# Altium PCB Bottom_layer_Lfr.PcbDoc
Units mm, origin at the board's own origin, x right, y up, seen from the top; angles counter-clockwise.
Board outline 116 x 91.03 mm, 2 copper layers (Top Layer, Bottom Layer); 22 components, 20 nets, 120 pads, 2 vias.
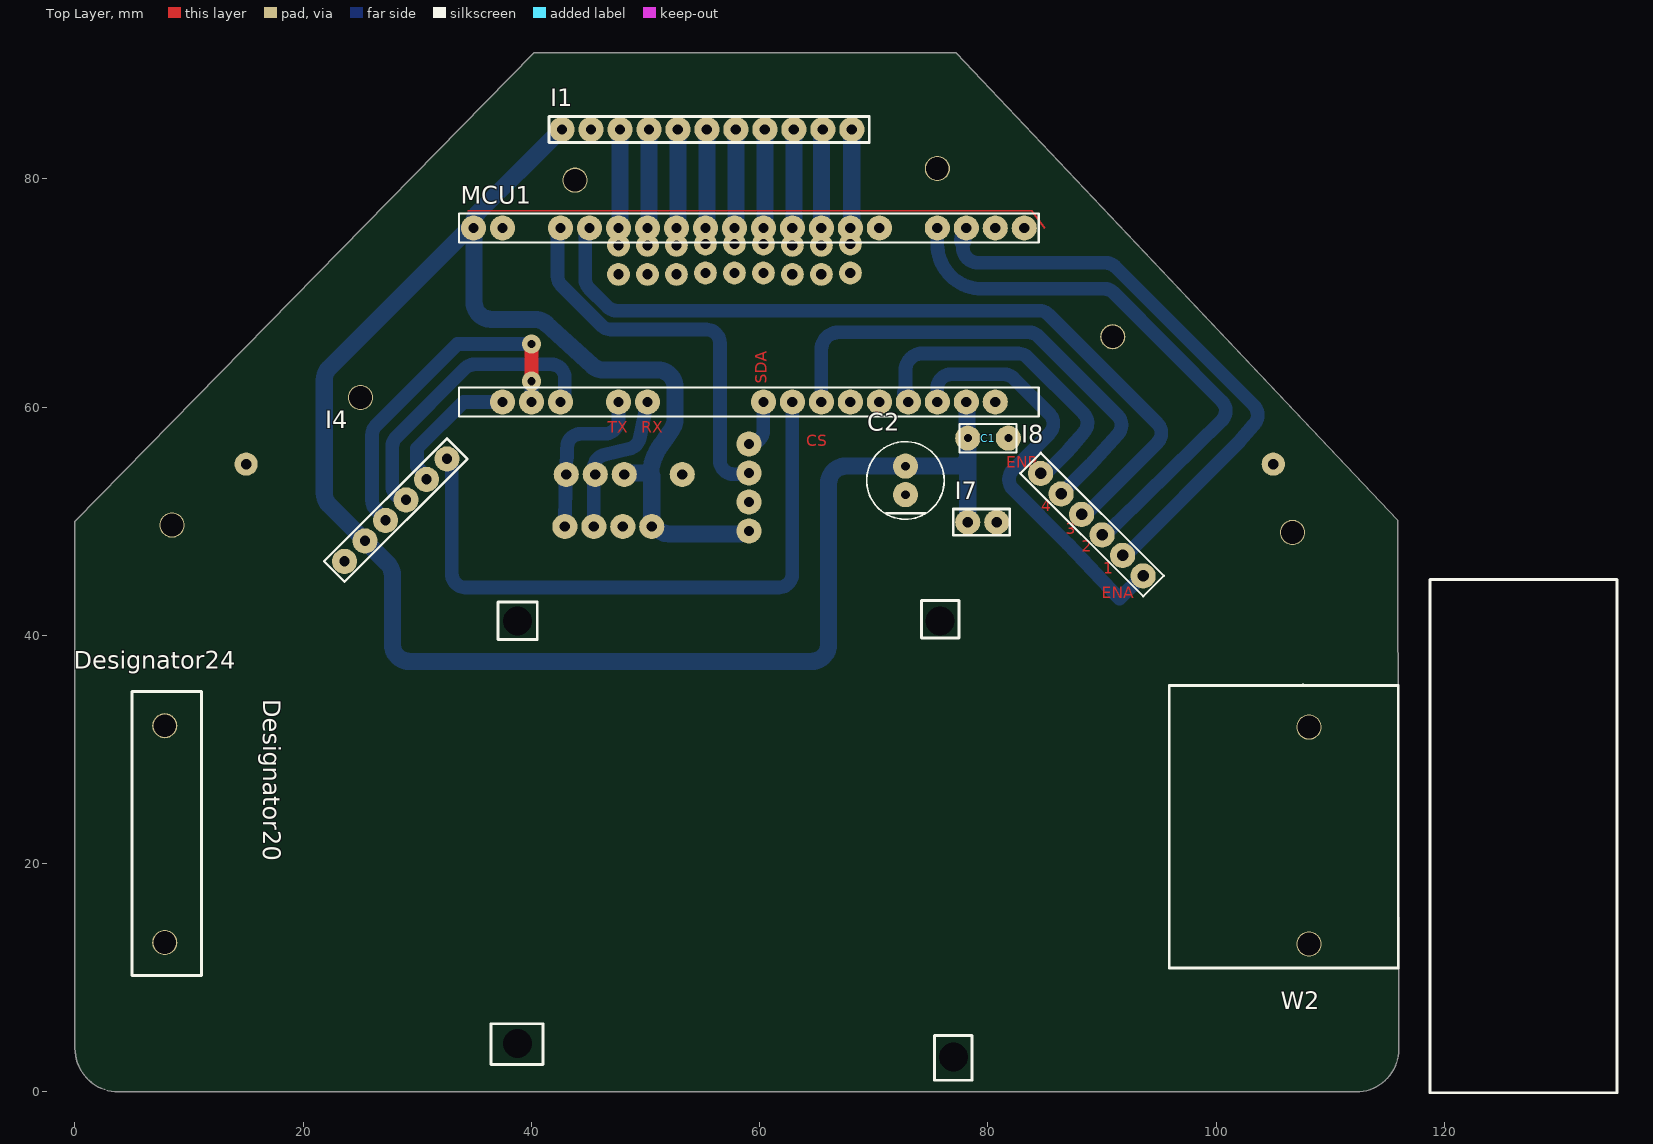
[diagram p0: Top Layer view]
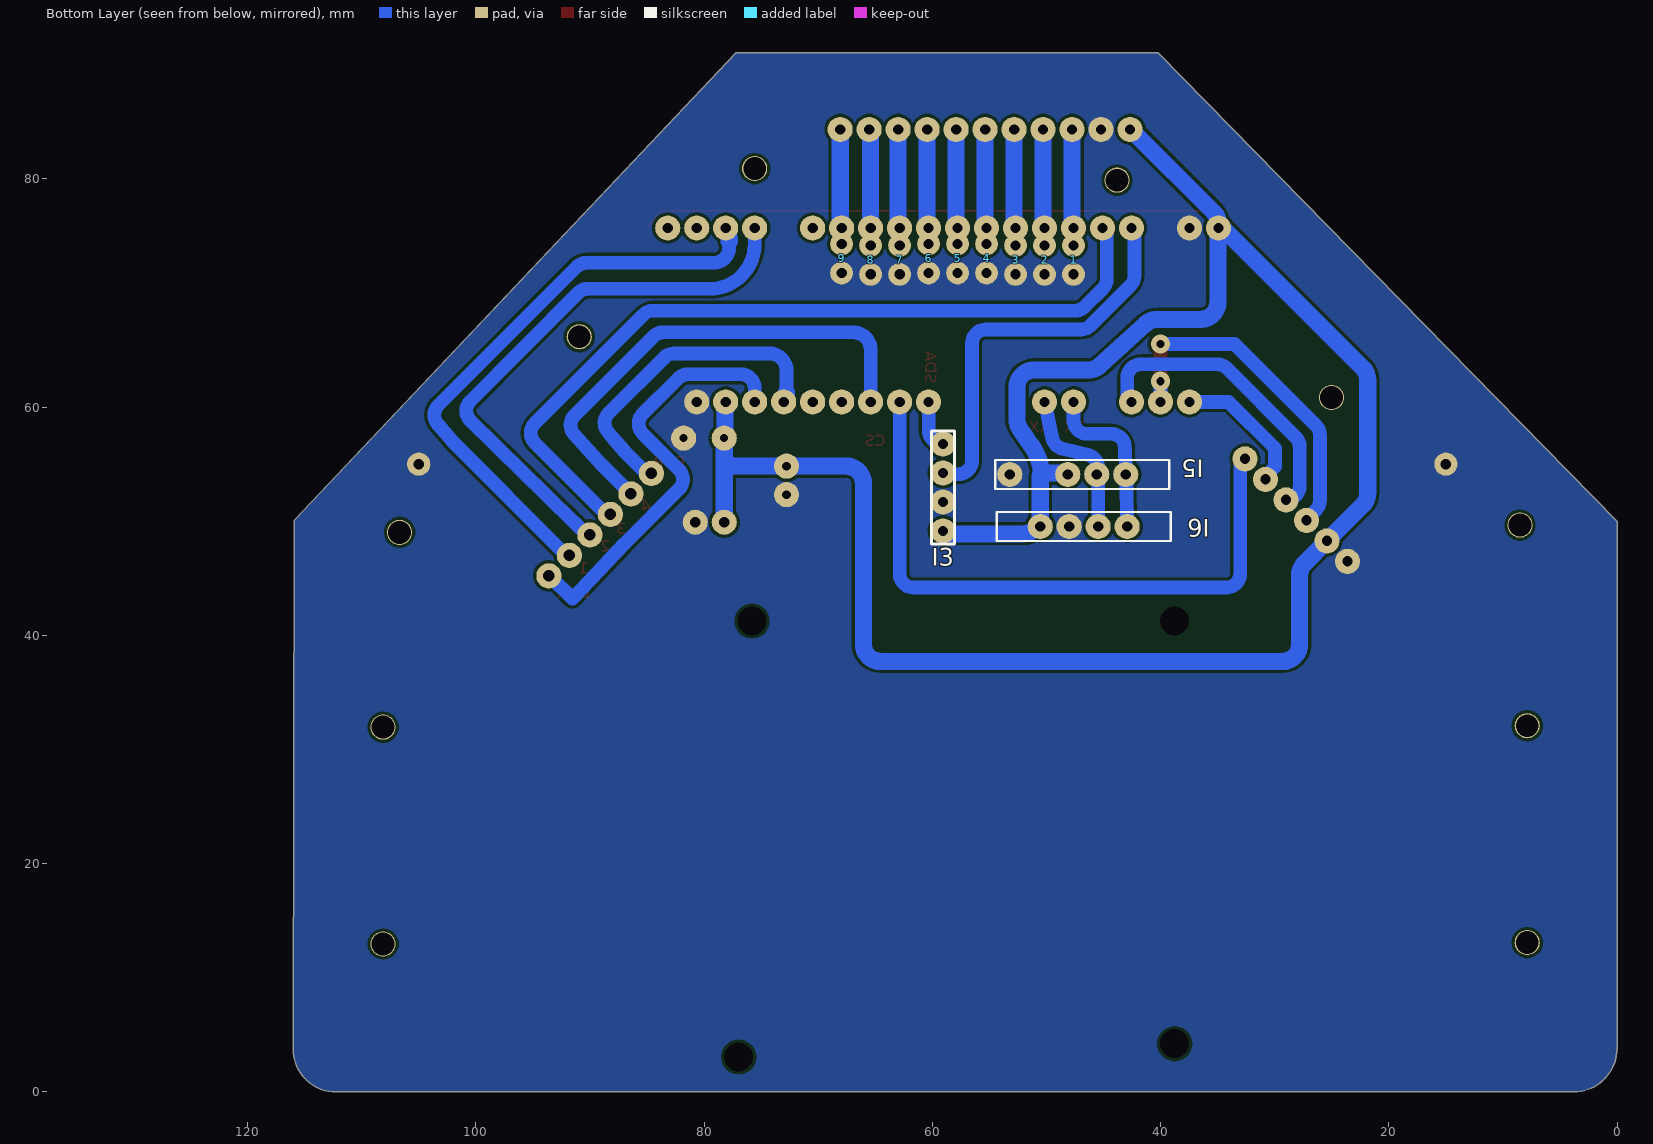
[diagram p1: Bottom Layer view, seen from below]

## Layer stack, top to bottom
Top Solder: solder mask 0.0102, Solder Resist, Dk 3.5
Top Layer: signal copper 0.0356
Dielectric 1: dielectric 0.32, FR-4, Dk 4.8
Bottom Layer: signal copper 0.0356
Bottom Solder: solder mask 0.0102, Solder Resist, Dk 3.5

## Board outline
0,3.81 0,50 40.195,91.032 77.216,91.032 115.896,50.104 116,3.732 cw(c112.269,3.731) 112.268,0 3.81,0 cw(c3.81,3.81)

## Design rules (kind name [scope] priority, off if disabled: settings)
Clearance [All] p1: gap=0.254 ignorepadtopadclearanceinfootprint=FALSE
PolygonConnect PolygonConnect_4 [All vs IsNamedPolygon('GND_L02_P000')] p1: thpad.connectstyle=Direct thpad.reliefconductorwidth=0.254 thpad.reliefentries=4 thpad.polygonreliefangle="90 Angle" thpad.airgapwidth=0.254 smdpad.connectstyle=Relief smdpad.reliefconductorwidth=0.254 smdpad.reliefentries=4 smdpad.polygonreliefangle="90 Angle" smdpad.airgapwidth=0.254 via.connectstyle=Relief via.reliefconductorwidth=0.254 via.reliefentries=4 via.polygonreliefangle="90 Angle" via.airgapwidth=0.254
PolygonConnect PolygonConnect_3 [All vs IsNamedPolygon('NONET_L01_P000')] p2: connectstyle=Relief reliefconductorwidth=0.254 reliefentries=4 polygonreliefangle="90 Angle" airgapwidth=0.254
PolygonConnect PolygonConnect_2 [All vs IsNamedPolygon('NONET_L01_P000')] p3: thpad.connectstyle=Direct thpad.reliefconductorwidth=0.254 thpad.reliefentries=4 thpad.polygonreliefangle="90 Angle" thpad.airgapwidth=0.254 smdpad.connectstyle=Relief smdpad.reliefconductorwidth=0.254 smdpad.reliefentries=4 smdpad.polygonreliefangle="90 Angle" smdpad.airgapwidth=0.254 via.connectstyle=Relief via.reliefconductorwidth=0.254 via.reliefentries=4 via.polygonreliefangle="90 Angle" via.airgapwidth=0.254
PolygonConnect PolygonConnect_1 [All vs IsNamedPolygon('NONET_L01_P000')] p4: thpad.connectstyle=Direct thpad.reliefconductorwidth=0.254 thpad.reliefentries=4 thpad.polygonreliefangle="90 Angle" thpad.airgapwidth=0.254 smdpad.connectstyle=Relief smdpad.reliefconductorwidth=0.254 smdpad.reliefentries=4 smdpad.polygonreliefangle="90 Angle" smdpad.airgapwidth=0.254 via.connectstyle=Relief via.reliefconductorwidth=0.254 via.reliefentries=4 via.polygonreliefangle="90 Angle" via.airgapwidth=0.254
PolygonConnect [All] p5: connectstyle=Relief reliefconductorwidth=0.254 reliefentries=4 polygonreliefangle="90 Angle" airgapwidth=0.254
RoutingVias [All] p1: holewidth=0.711 width=1.27 viastyle="Through Hole" minholewidth=0.711 minwidth=1.27 maxholewidth=0.711 maxwidth=1.27
SolderMaskExpansion [All] p1: expansion=0.102 istentingtop=FALSE
SupplyNets "Schematic Supply Nets_1" [InNet('GND')] p1: voltage=0.000
SupplyNets "Schematic Supply Nets" [InNet('+5')] p2: voltage=0.000
Width [All] p1: maxlimit=5 minlimit=0.1 preferedwidth=1.2 minimp=50.000000 maximp=50.000000 favimp=50.000000
30 further rules are at their usual default settings.

## Classes and differential pairs
component class MCU: I3 I7 MCU1
component class IR_array: C1 C2 I1

## Components (designator, comment, footprint, x,y, rotation, side; value= is the part's Value field where it differs from the comment)
1 "Comment" PCBComponent_1#1 47.625,74.168 r270 bottom
2 "Comment" PCBComponent_1#1 50.165,74.168 r270 bottom
3 "Comment" PCBComponent_1#1 52.705,74.168 r270 bottom
4 "Comment" PCBComponent_1#1 55.245,74.295 r270 bottom
5 "Comment" PCBComponent_1#1 57.785,74.295 r270 bottom
6 "Comment" PCBComponent_1#1 60.325,74.295 r270 bottom
7 "Comment" PCBComponent_1#1 62.865,74.168 r270 bottom
8 "Comment" PCBComponent_1#1 65.405,74.168 r270 bottom
9 "Comment" PCBComponent_1#1 67.945,74.295 r270 bottom
C1 "0.1uF" FP-RDE0P1-MFG 80.01,57.277 r0 top
C2 "ECEA1CKA101I" FP-RAD-TH-D_6_3_0_5-L_7_1-MFG 72.771,53.574 r90 top
Designator20 "Comment" PCBComponent_1#2 57.277,22.733 r0 top
Designator24 "Comment" PCBComponent_1#3 3.861,34.061 r270 top locked
I1 "MHP1x11" MHP_1x11_ 42.672,84.328 r0 top locked
I3 "I2S" HPC_1x4 59.055,49.149 r90 bottom
I4 "M_Driver" HPC_1x6#1 23.622,46.482 r45 top locked
I5 "HC_05" HPC_1x6#2 53.213,54.102 r180 bottom
I6 "HC_05" HPC_1x6#3 53.086,49.53 r180 bottom (schematic designator I5)
I7 "" PCBComponent_1#4 80.772,49.911 r180 top
I8 "FTDI" HPC_1x6#4 93.599,45.212 r135 top locked (schematic designator I6)
MCU1 "STM32F411CE" STM32F411CE 83.185,75.692 r90 top locked
W2 "Comment" N20 112.139,10.846 r90 top locked

## Footprints (in the part's own frame and the unit in brackets; to place one, negate y for a bottom-side part, rotate by r counter-clockwise, add the part's x,y. Pads: shape width x height; smd on the part's side, far side on the other; paste and mask are expansions set on the pad)
FP-RAD-TH-D_6_3_0_5-L_7_1-MFG [mm]
  round 2.2 hole 0.762 paste-2539.97 mask+0: 1(-1.25,0) 2(1.25,0)
  silkscreen extent -3.4,-3.4 3.4,3.4, body extent -3.15,-3.16 3.15,3.15, height 8
FP-RDE0P1-MFG [mm]
  round 2.2 hole 0.7 paste-2539.97 mask+0: 1(-1.778,0) 2(1.778,0)
  silkscreen extent -2.5,-1.25 2.5,1.25, body extent -2.5,-1.25 2.5,1.25, height 6
HPC_1x4 [mm]
  round 2.2 hole 0.9: 1(0,0) 2(2.54,0) 3(5.08,0) 4(7.62,0)
  silkscreen extent -1.14,-1.02 8.76,1.02
HPC_1x6#1 [mm]
  round 2.2 hole 0.9: 1(0,0) 2(2.54,0) 3(5.08,0) 4(7.62,0) 5(10.16,0) 6(12.7,0)
  silkscreen extent -1.27,-1.27 13.97,1.27
HPC_1x6#2 [mm]
  round 2.2 hole 0.9: 1(0,0) 3(5.08,0) 4(7.62,0) 5(10.16,0)
  round 2.2 on Mech1: 2(2.54,0) 6(12.7,0)
  silkscreen extent -1.27,-1.27 13.97,1.27
HPC_1x6#3 [mm]
  round 2.2 on Mech1: 1(0,0) 6(12.7,0)
  round 2.2 hole 0.9: 2(2.54,0) 3(5.08,0) 4(7.62,0) 5(10.16,0)
  silkscreen extent -1.27,-1.27 13.97,1.27
HPC_1x6#4 [mm]
  round 2.2 hole 1: 1(0,0) 2(2.54,0) 3(5.08,0) 4(7.62,0) 5(10.16,0) 6(12.7,0)
  silkscreen extent -1.27,-1.27 13.97,1.27
MHP_1x11_ [mm]
  round 2.2 hole 0.9 mask+0.102: 1(0,0) 2(2.54,0) 3(5.08,0) 4(7.62,0) 5(10.16,0) 6(12.7,0) 7(15.24,0) 8(17.78,0) 9(20.32,0) 10(22.86,0) 11(25.4,0)
  silkscreen extent -1.14,-1.14 26.92,1.14
N20 [mil]
  round 86.61 hole 79: 16(83,158) 17(831,158)
  silkscreen extent -430,-905 1340,640
PCBComponent_1#1 [mm]
  round 2 hole 0.9: 1(0,0) 2(2.54,0)
PCBComponent_1#2 [mm]
  round 2.2 hole 2.54: 21(-18.517,-18.517) 22(-18.517,18.517) 23(18.517,18.517) 24(19.685,-19.685) ""(19.685,-19.685)
  silkscreen extent -20.83,-21.72 21.34,20.32
PCBComponent_1#3 [mm]
  round 2.2 hole 2.007: 16(1.981,4.013) 17(20.98,4.013)
  silkscreen extent -1.02,1.14 23.88,7.24
PCBComponent_1#4 [mm]
  round 2.2 hole 0.9: 1(0,0) 2(2.54,0)
  silkscreen extent -1.14,-1.14 3.81,1.14
STM32F411CE [mm]
  round 2.2 hole 0.9 mask+0.102: 1(0,0) 2(0,2.54) 3(0,5.08) 4(0,7.62) 6(0,12.7) 7(0,15.24) 8(0,17.78) 9(0,20.32) 10(0,22.86) 11(0,25.4) 12(0,27.94) 13(0,30.48) 14(0,33.02) 15(0,35.56) 16(0,38.1) 17(0,40.64) 19(0,45.72) 20(0,48.26) 22(-15.24,2.54) 23(-15.24,5.08) 24(-15.24,7.62) 25(-15.24,10.16) 26(-15.24,12.7) 27(-15.24,15.24) 28(-15.24,17.78) 29(-15.24,20.32) 30(-15.24,22.86) 34(-15.24,33.02) 35(-15.24,35.56) 37(-15.24,40.64) 38(-15.24,43.18) 39(-15.24,45.72)
  round 2.2 on Mech1 mask+0.102: 5(0,10.16) 18(0,43.18) 21(-15.24,0) 31(-15.24,25.4) 32(-15.24,27.94) 33(-15.24,30.48) 36(-15.24,38.1) 40(-15.24,48.26)
  silkscreen extent -16.51,-1.27 1.27,49.53

## Part data
C1: library part CMP-06035-046728-1, "Ceramic Capacitor 100nF ±10% 25V X7R Radial", Capacitance=100nF, Case/Package=Radial, Dielectric=X7R, Max Operating Temperature=125°C, Min Operating Temperature=-55°C, Package Quantity=2000, Resistor Type=Ceramic, Tolerance=10%, Voltage Rating=25V, Height=3.5mm, Height - Seated (Max)=0.236inch, Lead Diameter=0.5mm, Lead Free="Lead Free", Lead Pitch=0.098inch, Length=0.197inch, Mount="Through Hole", Packaging="Tape and Reel", Termination=Radial, Voltage Rating (DC)=25V, Width=3.5mm
C2: library part CMP-05427-001316-1, "Aluminum Electrolytic Capacitors (Radial Lead Type) 100uF ±20% 16V", Capacitance=100uF, Case/Package=Radial, Max Operating Temperature=85°C, Min Operating Temperature=-40°C, Package Quantity=2000, Ripple Current=91mA, Tolerance=20%, Voltage=16V, Diameter=6.3mm, Height=7mm, Height - Seated (Max)=0.315inch, Lead Diameter=0.45mm, Lead Pitch=2.5mm, Length=7mm, Life (Hours)=1000Hour, Mount="Through Hole", Packaging="Tape and Reel", Polarity=Polar, Radiation Hardening=No, RoHS Compliant=Yes, Series=KA, Termination=Radial, Voltage Rating=16V, Voltage Rating (DC)=16V
I7: library part Component_1

## Free pads (board coordinates)
  round 2.032 hole 0.9: 2(15,55) 2(105,55)
  round 2.2 hole 2: 2(75.565,80.899) 3(43.815,79.883) 4(106.68,49.022) 6(8.509,49.657) 7(25.019,60.833) 8(90.932,66.167)

## Via types
v1: diameter 1.7, hole 0.711, Top Layer to Bottom Layer, 2 vias

## Nets (pads, with @x,y where several pads share a name; then routed paths per layer and width w, separated by ;. In a path a pad name is that pad's centre, name@x,y a point inside that pad or via, vN(x,y) a via of type N, cw(c..) or ccw(c..) an arc to the next point about the centre after c; other vN are vias at no path point)
+5: C1.1 C2.2 I1.1 I3.1 I4.2 I5.3 I6.2 I7.2 MCU1.20 MCU1.23 | length 185.2
  Top Layer w1.5: I1.1@42.533,84.189 I1.1 I1.1@42.533,84.255
  Bottom Layer w1.5: I1.1@42.533,84.258 42.533,84.189 ccw(c43.29,82.894) 42.232,83.957 35.363,77.089 ccw(c36.425,76.029) 34.925,76.029 MCU1.20 ; I5.3 cw(c48.737,52.729) 48.737,54.229 50.419,54.229 cw(c55.403,53.737) 51.374,56.712 51.655,57.093 ccw(c49.399,58.758) 51.734,57.205 52.327,58.096 ccw(c51.078,58.927) 52.578,58.925 52.578,61.746 ccw(c51.078,61.746) 51.078,63.246 46.33,63.246 cw(c46.33,64.746) 45.319,63.638 41.302,67.299 ccw(c40.292,66.191) 40.292,67.691 36.478,67.691 cw(c36.478,69.191) 34.978,69.191 34.978,75.296 ccw(c33.478,75.296) 34.926,75.689 MCU1.20 ; 50.546,53.975 50.546,50.395 ccw(c52.046,50.395) 52.046,48.895 58.223,48.895 ccw(c58.22,50.395) 58.534,48.928 58.916,49.01 I3.1 ; MCU1.23 78.158,60.399 78.158,57.351 C1.1 78.232,55.118 ; I7.2 78.232,55.118 ; MCU1.20 34.544,75.692 22.283,63.431 ccw(c23.344,62.371) 21.844,62.371 21.844,52.473 ccw(c23.344,52.473) 22.283,51.413 I4.2 27.374,46.322 cw(c26.313,45.262) 27.813,45.262 27.813,39.219 ccw(c29.313,39.219) 29.313,37.719 64.54,37.719 ccw(c64.54,39.219) 66.04,39.219 66.04,53.324 cw(c67.54,53.324) 67.54,54.824 C2.2 77.684,54.824 78.105,55.245 78.232,55.118
GND: 1.2 2.2 3.2 4.2 5.2 6.2 7.2 8.2 9.2 C1.2 C2.1 I1.2 I3.2 I4.1 I5.1 I6.3 I7.1 MCU1.19 MCU1.22 pad.2@15,55 pad.2@105,55
IR_01: 1.1 I1.3 MCU1.15 | length 8.7
  Bottom Layer w1.5: MCU1.15 ccw(c46.252,76.296) 47.752,76.296 I1.3
IR_02: 2.1 I1.4 MCU1.14 | length 8.7
  Top Layer w1.5: MCU1.14 MCU1.14@50.165,75.767
  Bottom Layer w1.5: MCU1.14@50.165,75.767 50.292,75.894 I1.4
IR_03: 3.1 I1.5 MCU1.13 | length 8.7
  Top Layer w1.5: MCU1.13 MCU1.13@52.705,75.767
  Bottom Layer w1.5: MCU1.13@52.705,75.767 52.832,75.894 I1.5
IR_04: 4.1 I1.6 MCU1.12 | length 8.7
  Top Layer w1.5: MCU1.12 MCU1.12@55.245,75.767
  Bottom Layer w1.5: MCU1.12@55.245,75.767 55.372,75.894 I1.6
IR_05: 5.1 I1.7 MCU1.11 | length 8.7
  Top Layer w1.5: MCU1.11 MCU1.11@57.785,75.767
  Bottom Layer w1.5: MCU1.11@57.785,75.767 57.912,75.894 I1.7
IR_06: 6.1 I1.8 MCU1.10 | length 10.1
  Bottom Layer w1.5: 6.1 MCU1.10 ccw(c58.952,76.296) 60.452,76.296 I1.8
IR_07: 7.1 I1.9 MCU1.9 | length 10.2
  Bottom Layer w1.5: 7.1 MCU1.9 ccw(c61.492,76.296) 62.992,76.296 I1.9
IR_08: 8.1 I1.10 MCU1.8 | length 8.7
  Bottom Layer w1.5: MCU1.8 65.405,83.727 cw(c66.905,83.724) I1.10
IR_09: 9.1 I1.11 MCU1.7 | length 8.7
  Bottom Layer w1.5: MCU1.7 ccw(c66.572,76.296) 68.072,76.296 I1.11
NetRe1_2: 
NetRe2_2: 
NetRe3_2: 
NetRe4_2: 
NetRe5_2: 
NetRe6_2: 
NetRe7_2: 
NetRe8_2: 
NetRe9_2: 
pads on no net: Designator20. Designator20.21 Designator20.22 Designator20.23 Designator20.24 Designator24.16 Designator24.17 I3.3 I3.4 I4.3 I4.4 I4.5 I4.6 I5.2 I5.4 I5.5 I5.6 I6.1 I6.4 I6.5 I6.6 I8.1 I8.2 I8.3 I8.4 I8.5 I8.6 MCU1.1 MCU1.2 MCU1.3 MCU1.4 MCU1.5 MCU1.6 MCU1.16 MCU1.17 MCU1.18 MCU1.21 MCU1.24 MCU1.25 MCU1.26 MCU1.27 MCU1.28 MCU1.29 MCU1.30 MCU1.31 MCU1.32 MCU1.33 MCU1.34 MCU1.35 MCU1.36 MCU1.37 MCU1.38 MCU1.39 MCU1.40 W2.16 W2.17
copper on no net: | length 525
  Top Layer w0.127: 34.417,77.216 83.82,77.216 84.963,75.692
  Top Layer w1.2: v1(40.005,62.265) 40.005,62.357 40.005,62.484 v1(40.005,65.532)
  Top Layer w1.5: 65.405,60.377 65.405,60.452 ; 75.512,60.399 75.565,60.452
  Bottom Layer w1.2: 27.214,50.074 ccw(c26.147,49.525) 26.997,50.373 26.386,50.983 cw(c27.235,51.831) 26.035,51.831 26.035,57.542 cw(c27.235,57.542) 26.386,58.39 33.528,65.532 36.97,65.532 37.351,65.532 v1(40.005,65.532) ; 29.01,51.87 29.001,51.87 cw(c29.013,53.07) 27.813,53.07 27.813,56.526 cw(c29.013,56.526) 28.164,57.374 34.193,63.403 cw(c35.041,62.554) 35.041,63.754 41.726,63.754 cw(c41.726,62.554) 42.926,62.554 42.926,61.329 cw(c41.726,61.33) 42.556,60.464 ccw(c43.149,59.848) 42.545,60.452 ; 30.806,53.666 30.806,53.937 29.972,54.771 29.972,56.388 34.036,60.452 37.465,60.452 ; 32.602,55.462 32.67,55.395 cw(c31.82,54.547) 33.02,54.547 33.02,45.396 ccw(c34.22,45.396) 34.22,44.196 61.665,44.196 ccw(c61.665,45.396) 62.865,45.396 62.865,60.452 ; 40.005,60.452 40.005,61.812 40.096,61.993 v1(40.005,62.265) ; 42.545,75.692 ccw(c43.491,74.954) 42.291,74.956 42.291,71.49 ccw(c43.491,71.49) 42.641,70.643 46.132,67.152 ccw(c46.979,68.002) 46.979,66.802 55.315,66.802 cw(c55.315,65.602) 56.515,65.602 56.515,59.436 56.515,55.318 ccw(c57.715,55.318) 57.715,54.118 58.554,54.118 ccw(c58.552,55.318) 59.054,54.228 59.055,54.229 ; 42.926,49.53 42.983,52.658 ccw(c41.783,52.68) 42.983,52.68 42.983,53.448 cw(c44.183,53.445) 42.984,53.492 43.053,55.245 ccw(c41.91,55.612) 43.11,55.612 43.11,56.242 cw(c44.31,56.239) 43.113,56.324 43.129,56.543 cw(c44.326,56.458) 44.326,57.658 46.425,57.658 ccw(c46.425,58.858) 47.625,58.858 47.625,60.452 ; 45.085,75.692 cw(c44.481,76.296) 45.074,75.68 ccw(c45.904,74.814) 44.704,74.814 44.704,71.236 ccw(c45.904,71.236) 45.054,70.389 45.055,70.388 46.641,68.802 ccw(c47.487,69.653) 47.483,68.453 47.487,68.453 84.466,68.453 cw(c84.466,67.253) 85.314,68.102 94.846,58.57 cw(c93.997,57.721) 94.846,56.873 88.915,50.942 cw(c88.068,51.792) 88.213,50.6 88.211,50.6 ; 45.466,49.53 45.466,51.054 45.466,52.68 45.466,54.102 45.466,54.652 cw(c46.666,54.652) 46.387,55.819 48.587,56.345 ccw(c48.31,57.512) 49.483,57.262 50.164,60.45 ccw(c48.991,60.703) 50.165,60.452 ; 59.055,56.769 ccw(c59.114,57.968) 60.314,57.968 60.314,60.435 ; 65.405,60.452 65.405,65.048 cw(c66.905,65.048) 66.905,66.548 83.577,66.548 cw(c83.577,65.348) 84.425,66.197 91.353,59.269 cw(c90.505,58.42) 91.578,57.883 cw(c90.505,58.42) 91.39,57.61 88.888,54.875 88.851,54.834 cw(c87.965,55.644) 88.814,54.795 86.415,52.396 ; 72.771,61.287 72.771,63.201 cw(c74.271,63.201) 74.271,64.701 82.63,64.701 cw(c82.63,63.501) 83.477,64.351 88.369,59.459 88.371,59.457 cw(c87.52,58.61) 88.431,57.829 87.278,56.484 86.898,56.042 cw(c85.987,56.823) 86.837,55.976 85.401,54.54 cw(c84.554,55.391) 84.619,54.192 ; 75.565,60.452 75.565,61.665 cw(c76.765,61.665) 76.765,62.865 81.418,62.865 cw(c81.418,61.665) 82.265,62.515 85.386,59.394 cw(c84.536,58.547) 85.386,57.7 82.192,54.506 ccw(c83.041,53.657) 82.191,52.81 86.932,48.069 cw(c86.084,47.22) 86.955,48.045 91.44,43.307 ; 75.565,75.692 75.565,74.295 ccw(c79.502,74.295) 79.502,70.358 90.193,70.358 cw(c90.193,69.158) 91.043,70.005 100.489,60.513 ; 77.792,74.017 ccw(c79.165,74.017) 79.165,72.644 90.308,72.644 cw(c90.308,71.444) 91.156,72.293 103.291,60.158 cw(c102.443,59.309) 103.312,58.481 103.31,58.48 ccw(c104.181,57.654) 103.267,58.431 102.031,56.971 cw(c101.116,57.747) 101.964,56.899 92.396,47.33 cw(c91.549,48.181) 91.803,47.008 ; 77.812,74.769 77.834,74.901 ; 90.007,48.804 ccw(c89.753,49.977) 90.601,49.127 91.408,49.935 cw(c92.257,49.087) 91.418,49.944 100.478,58.809 ccw(c99.639,59.667) 100.49,60.513 ; 91.532,43.215 93.529,45.212 93.599,45.212
  Bottom Layer w1.5: 72.771,61.287 ccw(c74.271,61.287) 73.025,60.452 ; 77.792,74.528 cw(c79.292,74.528) 77.812,74.769 ; 77.834,74.901 cw(c79.314,74.656) 77.875,75.082 77.93,75.265 cw(c79.367,74.836) 77.994,75.44 78.105,75.692 ; 83.185,75.692 83.289,75.553

## Polygon pours and split planes (outlines as drawn)
GND on Bottom Layer "GND_L02_P000" (solid, remove dead copper, pour order 0): 0,3.81 0,50 40.195,91.032 77.216,91.032 115.896,50.104 116,3.732 cw(c112.269,3.731) 112.268,0 3.81,0 cw(c3.81,3.81)

## Other copper
Top Layer:
  text "SDA" at 60.633,62.049 h1 r90
  text "TX" at 46.682,57.731 h1
  text "RX" at 49.603,57.731 h1
  text "CS" at 64.081,56.588 h1
  text "ENB" at 81.607,54.683 h1
  text "4" at 84.655,50.873 h1
  text "3" at 86.814,48.841 h1
  text "2" at 88.211,47.317 h1
  text "1" at 90.116,45.412 h1
  text "ENA" at 89.989,43.253 h1

## Silkscreen, mask and mechanical layers (free items; w line width, h text height)
Mechanical 1:
  lines w0.127: 0,43.942 32.989,43.741 33.02,75.692 ; 84.963,75.692 85.357,43.289 ; 116.205,43.053 107.484,43.12 ; 116.547,43.194 107.484,43.12 ; 85.357,43.289 85.359,43.064 ccw(c85.486,43.066) 85.487,42.939 107.484,43.12 ; 85.357,43.289 107.484,43.12
Top Assembly:
  text "I7" at 73.66,49.149 h1.52
Top Component Center:
  lines w0.127: 0.127,49.784 0.127,50.546 5.461,50.546